# EAGLE board me433_2017 (EAGLE 8.1.0)

Size 50 x 50 mm. Coordinates in mm from the lower left corner, seen from the top.
Outline: 0,0 50,0 50,50 0,50 0,0
Copper layers (1*16): Top 0.035mm / dielectric 1.5mm / Bottom 0.035mm
Design rules "default": minimum track width 10mil, minimum drill 24mil, track to track 8mil, track to pad 8mil, pad to pad 8mil, via to via 8mil, smd to smd 8mil, copper to edge 40mil, drill to drill 8mil, minimum pad ring 10mil, minimum via ring 8mil, stop-mask expansion 4mil, vias tented up to drill 0mil, thermal gap 10mil

## Footprints (pad centres in the part's own frame; a part is rotated, then mirrored left to right if it is on the bottom)
C025-025X050 = drill 0.813 octagon: 1 -1.27,0; 2 1.27,0
B45181B = drill 0.813: + -2.54,0 | drill 0.813 octagon: - 2.54,0
1X08 = drill 1.016 pad 1.88: 1 0,0; 2 2.54,0; 3 5.08,0; 4 7.62,0; 5 10.16,0; 6 12.7,0; 7 15.24,0; 8 17.78,0
USB-MB-H = drill 0.8: D+ 5.1,0; D- 3.9,0.8; GND 5.1,-1.6; ID 3.9,-0.8; VBUS 5.1,1.6 | drill 1.9: P$6 0,-3.65; P$7 0,3.65
LED3MM = drill 0.813 octagon: A -1.27,0; K 1.27,0
0207/10 = drill 0.813 octagon: 1 -5.08,0; 2 5.08,0
DIL28-3 = drill 0.813 long: 1 -16.51,-3.81; 2 -13.97,-3.81; 3 -11.43,-3.81; 4 -8.89,-3.81; 5 -6.35,-3.81; 6 -3.81,-3.81; 7 -1.27,-3.81; 8 1.27,-3.81; 9 3.81,-3.81; 10 6.35,-3.81; 11 8.89,-3.81; 12 11.43,-3.81; 13 13.97,-3.81; 14 16.51,-3.81; 15 16.51,3.81; 16 13.97,3.81; 17 11.43,3.81; 18 8.89,3.81; 19 6.35,3.81; 20 3.81,3.81; 21 1.27,3.81; 22 -1.27,3.81; 23 -3.81,3.81; 24 -6.35,3.81; 25 -8.89,3.81; 26 -11.43,3.81; 27 -13.97,3.81; 28 -16.51,3.81
SLIDE = drill 0.8: 1 -2,0; 2 0,0; 3 2,0 | drill 1: P$1 -4,0; P$2 4,0
TO92 = drill 0.813 octagon: 1 -1.27,0; 2 0,1.905; 3 1.27,0
PB = drill 1.016 pad 1.88: 1 -2.54,0; 2 2.54,0
1X05 = drill 1.016 pad 1.88: 1 0,0; 2 2.54,0; 3 5.08,0; 4 7.62,0; 5 10.16,0
OSC = drill 1.016 pad 1.88: 1 -2.54,0; 2 0,0; 3 2.54,0

## Placement (x,y rotation side)
C1  0.1uF  [C025-025X050]  20.32,8.89 180 top
C2  0.1uF  [C025-025X050]  20.32,3.81 90 top
C3  0.1uF  [C025-025X050]  13.97,3.81 90 top
C4  10uF  [B45181B]  20.32,17.78 90 top
C6  10uF  [B45181B]  13.97,10.16 90 top
C7  0.1uF  [C025-025X050]  7.62,3.81 90 top
J1  [1X08]  2.54,41.91 0 top
J2  [1X08]  2.54,44.45 0 top
J3  USB  [USB-MB-H]  26.67,5.08 0 top
LED1  RED  [LED3MM]  46.99,46.99 180 top
LED2  GREEN  [LED3MM]  19.05,31.75 180 top
R1  330  [0207/10]  34.29,46.99 0 top
R2  330  [0207/10]  6.35,25.4 0 top
R3  10k  [0207/10]  21.59,46.99 180 top
R4  10k  [0207/10]  6.35,29.21 0 top
U$1  PIC32MX250F128B  [DIL28-3]  40.64,25.4 270 top
U$2  SLIDE  [SLIDE]  45.72,2.54 0 top
U$3  MCP1702  [TO92]  3.81,8.89 0 top
U$4  RESET  [PB]  13.97,19.05 90 top
U$5  USER  [PB]  25.4,31.75 90 top
U$6  PICKIT3  [1X05]  2.54,38.1 0 top
U$7  8MHz  [OSC]  5.08,13.97 180 top

## Library data of the parts
C1-C3 R1-R4 = resistor
C4 C6 C7 = rcl
J1-J3 U$1-U$7 = me433_2017
LED1 LED2 = led

## Nets
+3V3: C2.1 C3.1 C6.+ C7.1 J2.2 LED1.A R4.2 U$1.13 U$1.23 U$1.28 U$3.3 U$6.2
+5V: C1.1 J1.2 U$1.15 U$2.3 U$3.2
A0: J2.8 U$1.2
A1: J2.7 U$1.3
A4/LED: J2.3 LED2.A U$1.12
B2: J2.6 U$1.6
B3: J2.5 U$1.7
B4/USER: J2.4 R3.1 R3.2 U$1.11 U$4.1 U$4.2
B7: J1.3 U$1.16
B8: J1.4 U$1.17
B9: J1.5 U$1.18
B13: J1.6 U$1.24
B14: J1.7 U$1.25
B15: J1.8 U$1.26
D+: J3.D+ U$1.21
D-: J3.D- U$1.22
GND: C1.2 C2.2 C3.2 C4.- J1.1 J2.1 J3.GND R1.1 R2.1 U$1.8 U$1.19 U$1.27 U$3.1 U$5.2 U$6.3 U$7.2
MCLR: R4.1 U$1.1 U$5.1 U$6.1
N$2: LED1.K R1.2
N$3: U$7.1
N$4: U$1.10 U$7.3
N$9: U$1.5
N$17: C4.+ U$1.20
N$33: LED2.K R2.2
PGC: U$6.5
PGD: U$1.4 U$6.4
USBID: J3.ID U$1.14
VBUS: J3.VBUS U$2.2

## Tracks (layer width: path | path; a pad name or v marks a point on that pad's centre or on a via)
+3V3  (11 unrouted)
+5V  (4 unrouted)
A0  (1 unrouted)
A1  (1 unrouted)
A4/LED  (2 unrouted)
B2  (1 unrouted)
B3  (1 unrouted)
B4/USER  (5 unrouted)
B7  (1 unrouted)
B8  (1 unrouted)
B9  (1 unrouted)
B13  (1 unrouted)
B14  (1 unrouted)
B15  (1 unrouted)
D+  (1 unrouted)
D-  (1 unrouted)
GND  (15 unrouted)
MCLR  (3 unrouted)
N$2  (1 unrouted)
N$4  (1 unrouted)
N$17  (1 unrouted)
N$33  (1 unrouted)
PGD  (1 unrouted)
USBID  (1 unrouted)
VBUS  (1 unrouted)